# Altium PCB EleksTube_IPS_extend.PcbDoc
Units mil, origin at the board's own origin, x right, y up, seen from the top; angles counter-clockwise.
Board outline 590.55 x 1496.06 mil, 2 copper layers (Top Layer, Bottom Layer), stack 47.244 mil thick; 7 components, 13 nets, 38 pads, 98 vias.
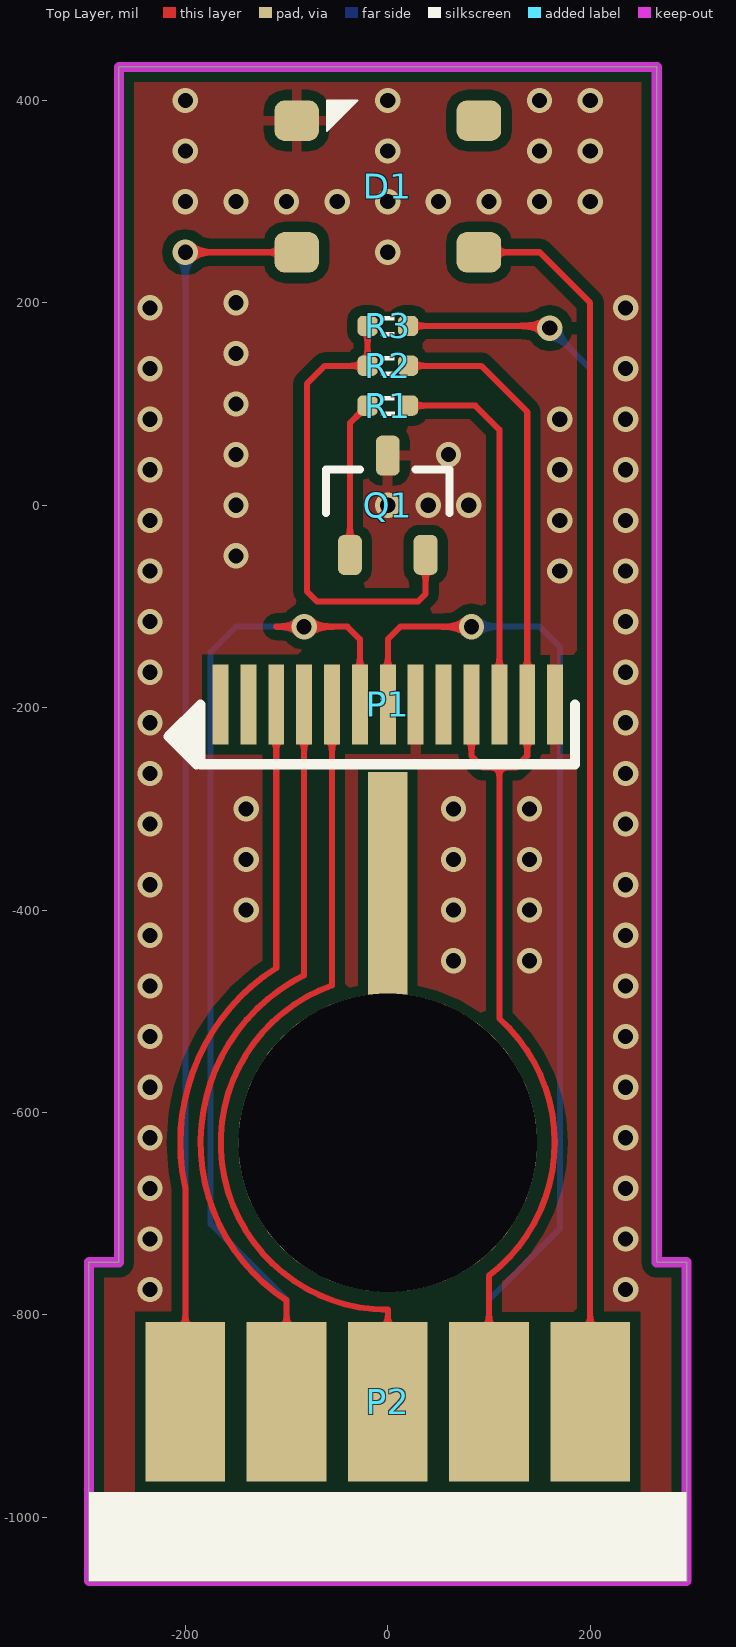
[diagram p0: Top Layer view]
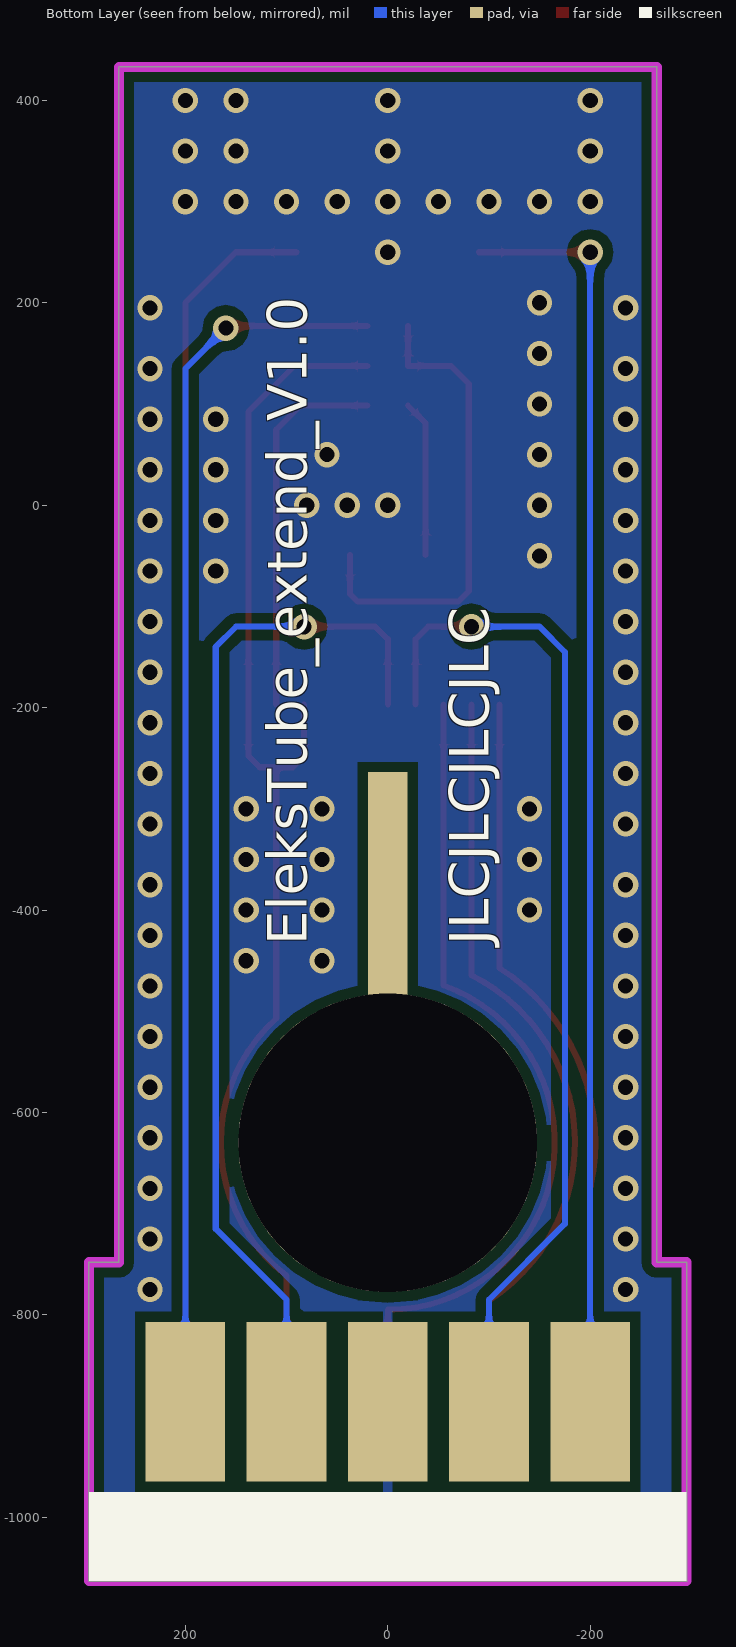
[diagram p1: Bottom Layer view, seen from below]
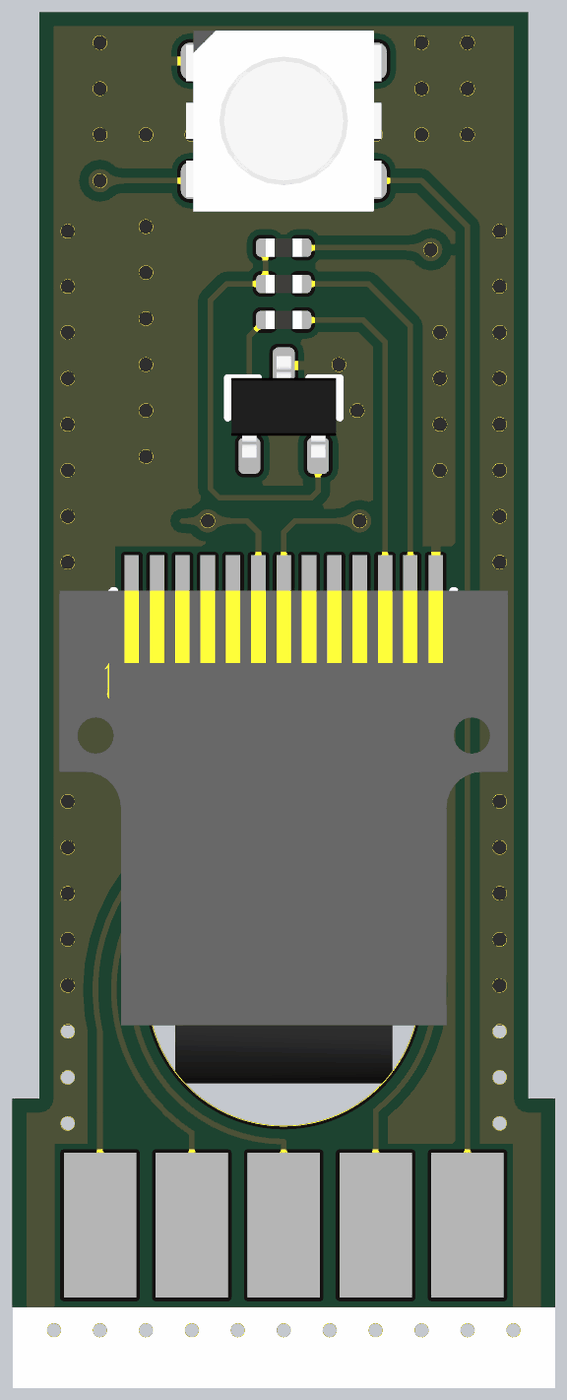
[diagram p2: 3D render of the assembled board from above, using the file's embedded part models]

## Layer stack, top to bottom
Top Solder: solder mask 3.937, Solder Resist, Dk 3.5
Top Layer: signal copper 3.937
Dielectric 1: dielectric 39.3701, FR-4, Dk 4.8
Bottom Layer: signal copper 3.937
Bottom Solder: solder mask 3.937, Solder Resist, Dk 3.5

## Board outline
-295.28,-1062.99 -295.28,-748.03 -265.75,-748.03 -265.75,433.07 265.75,433.07 265.75,-748.03 295.28,-748.03 295.28,-1062.99

## Design rules (kind name [scope] priority, off if disabled: settings)
Clearance [All] p1: gap=10
PolygonConnect PolygonConnect_1 [IsVia] p1: connectstyle=Direct reliefconductorwidth=10 reliefentries=4 polygonreliefangle="90 Angle" airgapwidth=10
PolygonConnect [All] p2: connectstyle=Relief reliefconductorwidth=10 reliefentries=4 polygonreliefangle="90 Angle" airgapwidth=10
RoutingVias [All] p1: holewidth=28 width=50 viastyle="Through Hole" minholewidth=28 minwidth=50 maxholewidth=28 maxwidth=50
SolderMaskExpansion [All] p1: expansion=4
Width [All] p1: maxlimit=100 minlimit=1 preferedwidth=10 minimp=50.000000 maximp=50.000000 favimp=50.000000
30 further rules are at their usual default settings.

## Components (designator, comment, footprint, x,y, rotation, side; value= is the part's Value field where it differs from the comment)
D1 "RGB" LED_5050_WS2812B 0,314.96 r180 top
P1 "TFT-0.96" TFT-0.96 0,-196.85 r0 top locked
P2 "GoldFinger-10" GOLDFINGER-10 0,-885.83 r180 top
Q1 "S8050" SOT23-3 0,0 r90 top
R1 "10R" RES_0402 0,98.43 r0 top
R2 "10K" RES_0402 0,137.8 r0 top
R3 "1K" RES_0402 0,177.17 r180 top

## Footprints (in the part's own frame and the unit in brackets; to place one, negate y for a bottom-side part, rotate by r counter-clockwise, add the part's x,y. Pads: shape width x height; smd on the part's side, far side on the other; paste and mask are expansions set on the pad)
GOLDFINGER-10 [mm]
  rect 2x4 smd: 1(-5.08,0) 2(-2.54,0) 3(0,0) 4(2.54,0) 5(5.08,0)
  rect 2x4 smd far side: 6(5.08,0) 7(2.54,0) 8(0,0) 9(-2.54,0) 10(-5.08,0)
LED_5050_WS2812B [mil]
  rrect50% 44x40 smd: 1(-90,65) 2(-90,-65) 3(90,-65) 4(90,65)
  silkscreen extent 30,-85 60,-55, body extent -106,-98 106,98, height 69
RES_0402 [mil]
  rrect50% 20x20 smd: 1(-20,0) 2(20,0)
  silkscreen extent -6,-10 6,10, body extent -20,-10 20,10, height 14
SOT23-3 [mm] "SOT23, 3-Leads, Body 3.1x3.0mm (max), Pitch 0.95mm, IPC Medium Density"
  rrect50% 1x0.6 smd: 1(-1.246,0.95) 2(-1.246,-0.95) 3(1.246,0)
  silkscreen extent -0.2,-1.55 0.9,1.55, body extent -1.3,-1.45 1.5,1.45, height 1.2
TFT-0.96 [mm]
  rect 0.4x2 smd: 1(-4.2,0) 2(-3.5,0) 3(-2.8,0) 4(-2.1,0) 5(-1.4,0) 6(-0.7,0) 7(0,0) 8(0.7,0) 9(1.4,0) 10(2.1,0) 11(2.8,0) 12(3.5,0) 13(4.2,0)
  silkscreen extent -5.5,-1.5 4.7,0, body extent -6.75,-13.57 6.75,15.98, height 0.2

## Part data
D1: library part LED_5050_WS2812B, "LED"
P1: library part "Header 13", "Header, 13-Pin"
P2: "Header, 5-Pin, Dual row"
Q1: library part NPN, "NPN Bipolar Transistor"
R1 R2 R3: library part 电阻-0402, "Resistor"

## Free pads (board coordinates)
  round 295.28 hole 295.28: 0(0,-629.92)
  rect 39.37x511.81 hole 39.37 square: 0(0,-519.68)

## Via types
v1: diameter 25, hole 15, Top Layer to Bottom Layer, tented both sides, 98 vias

## Nets (pads, with @x,y where several pads share a name; then routed paths per layer and width w, separated by ;. In a path a pad name is that pad's centre, name@x,y a point inside that pad or via, vN(x,y) a via of type N, cw(c..) or ccw(c..) an arc to the next point about the centre after c; other vN are vias at no path point)
BLK: P2.10 R3.1 | length 1218.3
  Top Layer w6: R3.1 157.83,177.17 v1(160,175)
  Bottom Layer w6: v1(160,175) 200,135 P2.10
CS: P1.7 P2.9 | length 1022.7
  Top Layer w6: P1.7 0,-132.44 12.44,-120 v1(82.68,-120)
  Bottom Layer w6: v1(82.68,-120) 150,-120 170,-140 170,-715 100,-785 P2.9
DC: P1.5 P2.3 | length 830.7
  Top Layer w6: -55.12,-474.35 P1.5 ; -54.97,-474.35 ccw(c0,-629.92) 0,-794.92 P2.3
GND: D1.3 P1.8 P1.13 P2.8 Q1.3
  other v1: -250,-1000 -200,-1000 -150,-1000 -100,-1000 -50,-1000 0,-1000 50,-1000 100,-1000 150,-1000 200,-1000 250,-1000 -235,-775 235,-775 -235,-725 235,-725 -235,-675 235,-675 -235,-625 235,-625 -235,-575 235,-575 -235,-525 235,-525 -235,-475 235,-475 65,-450 140,-450 -235,-425 235,-425 -140,-400 65,-400 140,-400 -235,-375 235,-375 -140,-350 65,-350 140,-350 -235,-315 235,-315 -140,-300 65,-300 140,-300 -235,-265 235,-265 -235,-215 235,-215 -235,-165 235,-165 -235,-115 235,-115 -235,-65 170,-65 235,-65 -150,-50 -235,-15 170,-15 235,-15 -150,0 0,0 40,0 80,0 -235,35 170,35 235,35 -150,50 60,50 -235,85 170,85 235,85 -150,100 -235,135 235,135 -150,150 -235,195 235,195 -150,200 0,250 -200,300 -150,300 -100,300 -50,300 0,300 50,300 100,300 150,300 200,300 -200,350 0,350 150,350 200,350 -200,400 0,400 150,400 200,400
LEDK: P1.11 R1.2 | length 371.7
  Top Layer w6: R1.2 86.57,98.43 110.24,74.76 P1.11
NetQ1_1: Q1.1 R1.1 | length 154.7
  Top Layer w6: Q1.1 -37.4,81.02 R1.1
NetQ1_2: Q1.2 R2.1 R3.2 | length 474.9
  Top Layer w6: R3.2 R2.1 -62.2,137.8 -80,120 -80,-85 -70,-95 30,-95 37.4,-87.6 Q1.2
RES: P1.6 P2.7 | length 1026.8
  Top Layer w6: -110.24,-120 -40,-120 -27.56,-132.44 P1.6
  Bottom Layer w6: P2.7 -100,-785 -175,-710 -175,-145 -150,-120 v1(-82.68,-120)
RGB_LED: D1.4 P2.6 | length 1245.8
  Top Layer w6: v1(-200,249.96) D1.4
  Bottom Layer w6: P2.6 v1(-200,249.96)
SCL: P1.4 P2.4 | length 757.7
  Top Layer w6: -100.08,-785.52 cw(c0,-629.92) -82.68,-464.42 P1.4 ; P2.4 -100,-785.4
SDA: P1.3 P2.5 | length 722.1
  Top Layer w6: P2.5 -200,-674.92 cw(c0,-629.92) -201,-670.22 cw(c0,-629.92) -201,-589.62 cw(c0,-629.92) -110.24,-457.08 P1.3
VCC_3V3: P1.10 P1.12 P2.2 R2.2 | length 1254.9
  Top Layer w6: R2.2 92.2,137.8 137.8,92.2 P1.12 137.8,-247.68 126.58,-258.9 110.24,-258.9 ; P1.10 82.68,-247.68 93.9,-258.9 110.24,-258.9 ; P2.2 100,-761.17 ccw(c0,-629.92) 110.24,-507.15 110.24,-258.9
VDD_5V: D1.1 P2.1 | length 1216.5
  Top Layer w6: D1.1 150.04,249.96 200,200 P2.1
pads on no net: D1.2 P1.1 P1.2 P1.9

## Polygon pours and split planes (outlines as drawn)
GND on Top Layer "Bottom Layer" (solid, remove dead copper, pour order 4): -295.28,-1062.99 -295.28,-748.03 -265.75,-748.03 -265.75,433.07 265.75,433.07 265.75,-748.03 295.28,-748.03 295.28,-1062.99
GND on Bottom Layer "Bottom Layer" (solid, remove dead copper, pour order 3): 295.28,-1062.99 295.28,-748.03 265.75,-748.03 265.75,433.07 -265.75,433.07 -265.75,-748.03 -295.28,-748.03 -295.28,-1062.99

## Keep-outs
Keep-Out Layer:
  the board outline again, w10

## Silkscreen, mask and mechanical layers (free items; w line width, h text height)
Top Overlay:
  rectangle: -295.28,-1062.99 295.28,-975
Bottom Overlay:
  region: 295.28,-975 -295.28,-975 -295.28,-1062.99 295.28,-1062.99
  text "JLCJLCJLCJLC" at -100,-435 h39.37 r270
  text "EleksTube_extend_V1.0" at 80,-435 h39.37 r270